# EAGLE board RedBot Whisker Bumper-Panel-v11 (EAGLE 6.5.0)
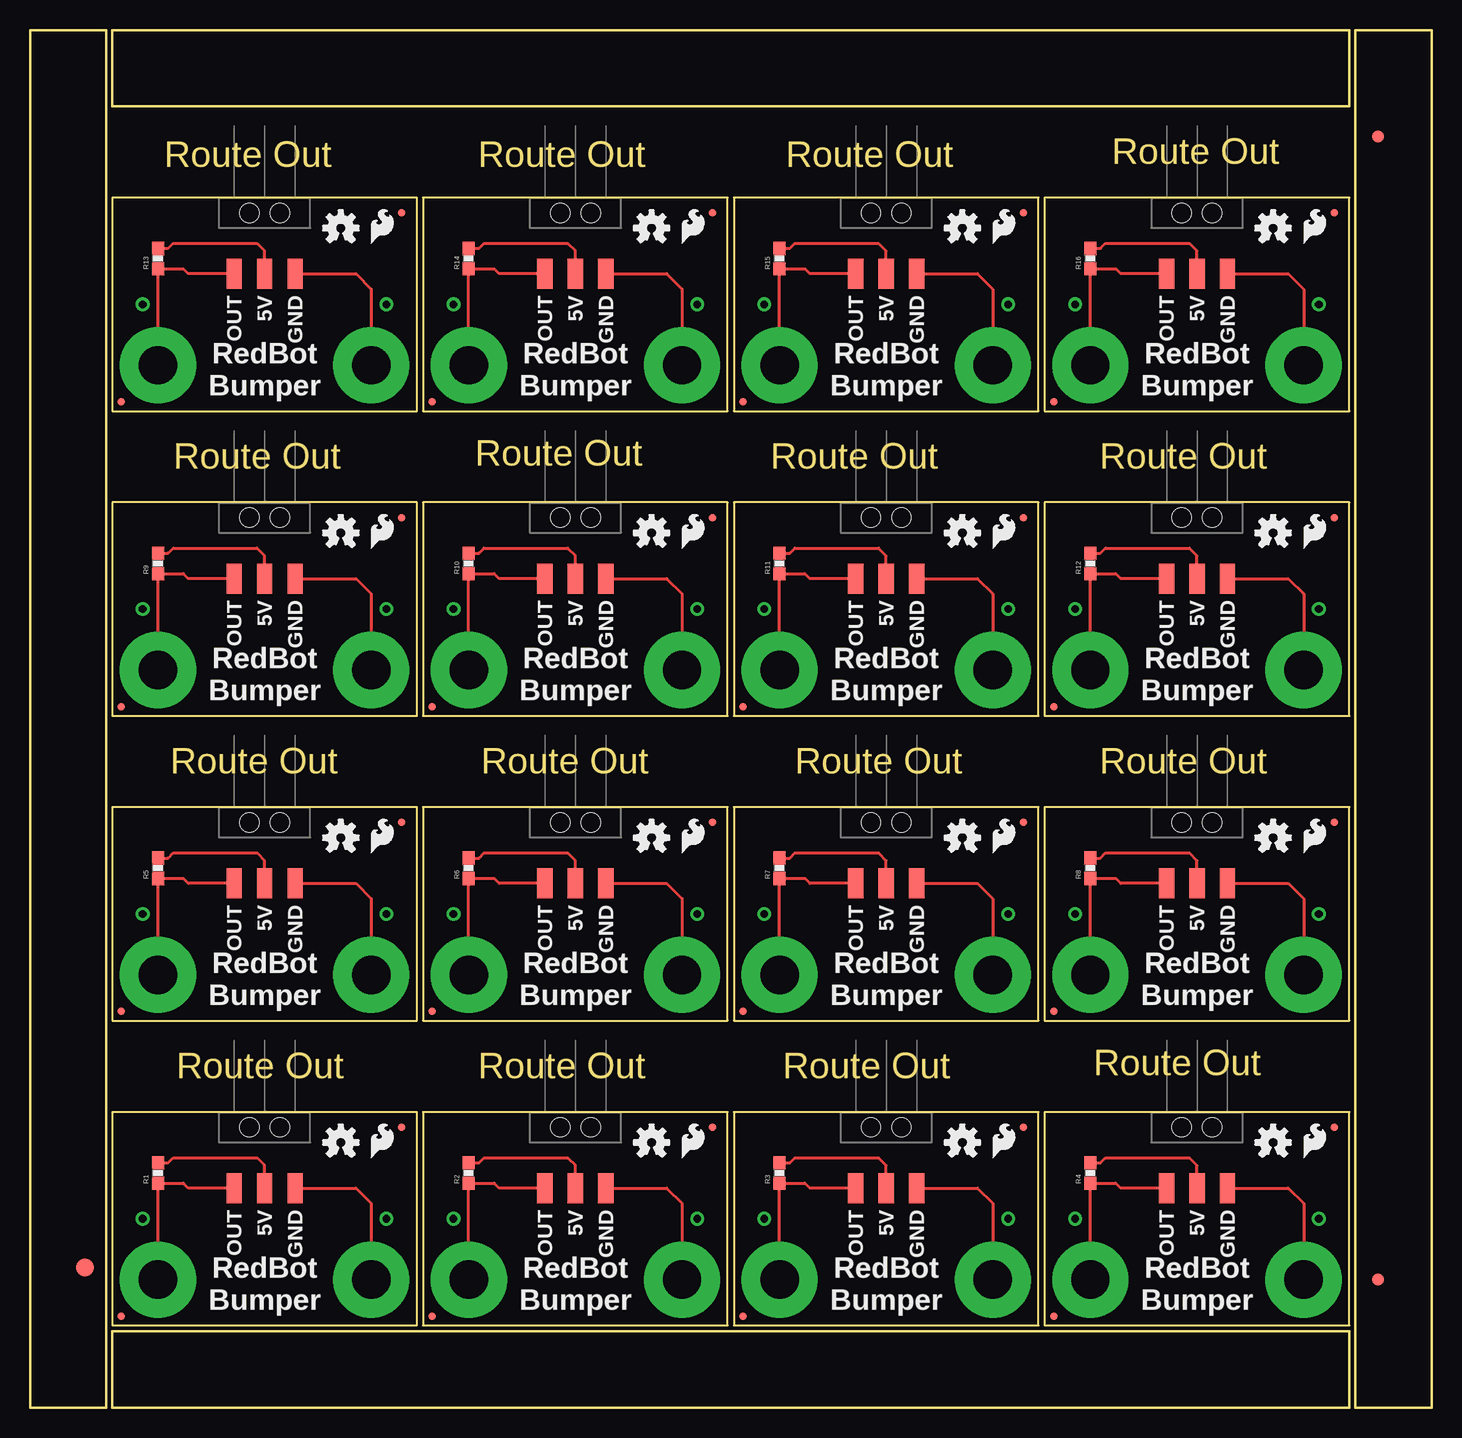
[diagram p0: board, top side]
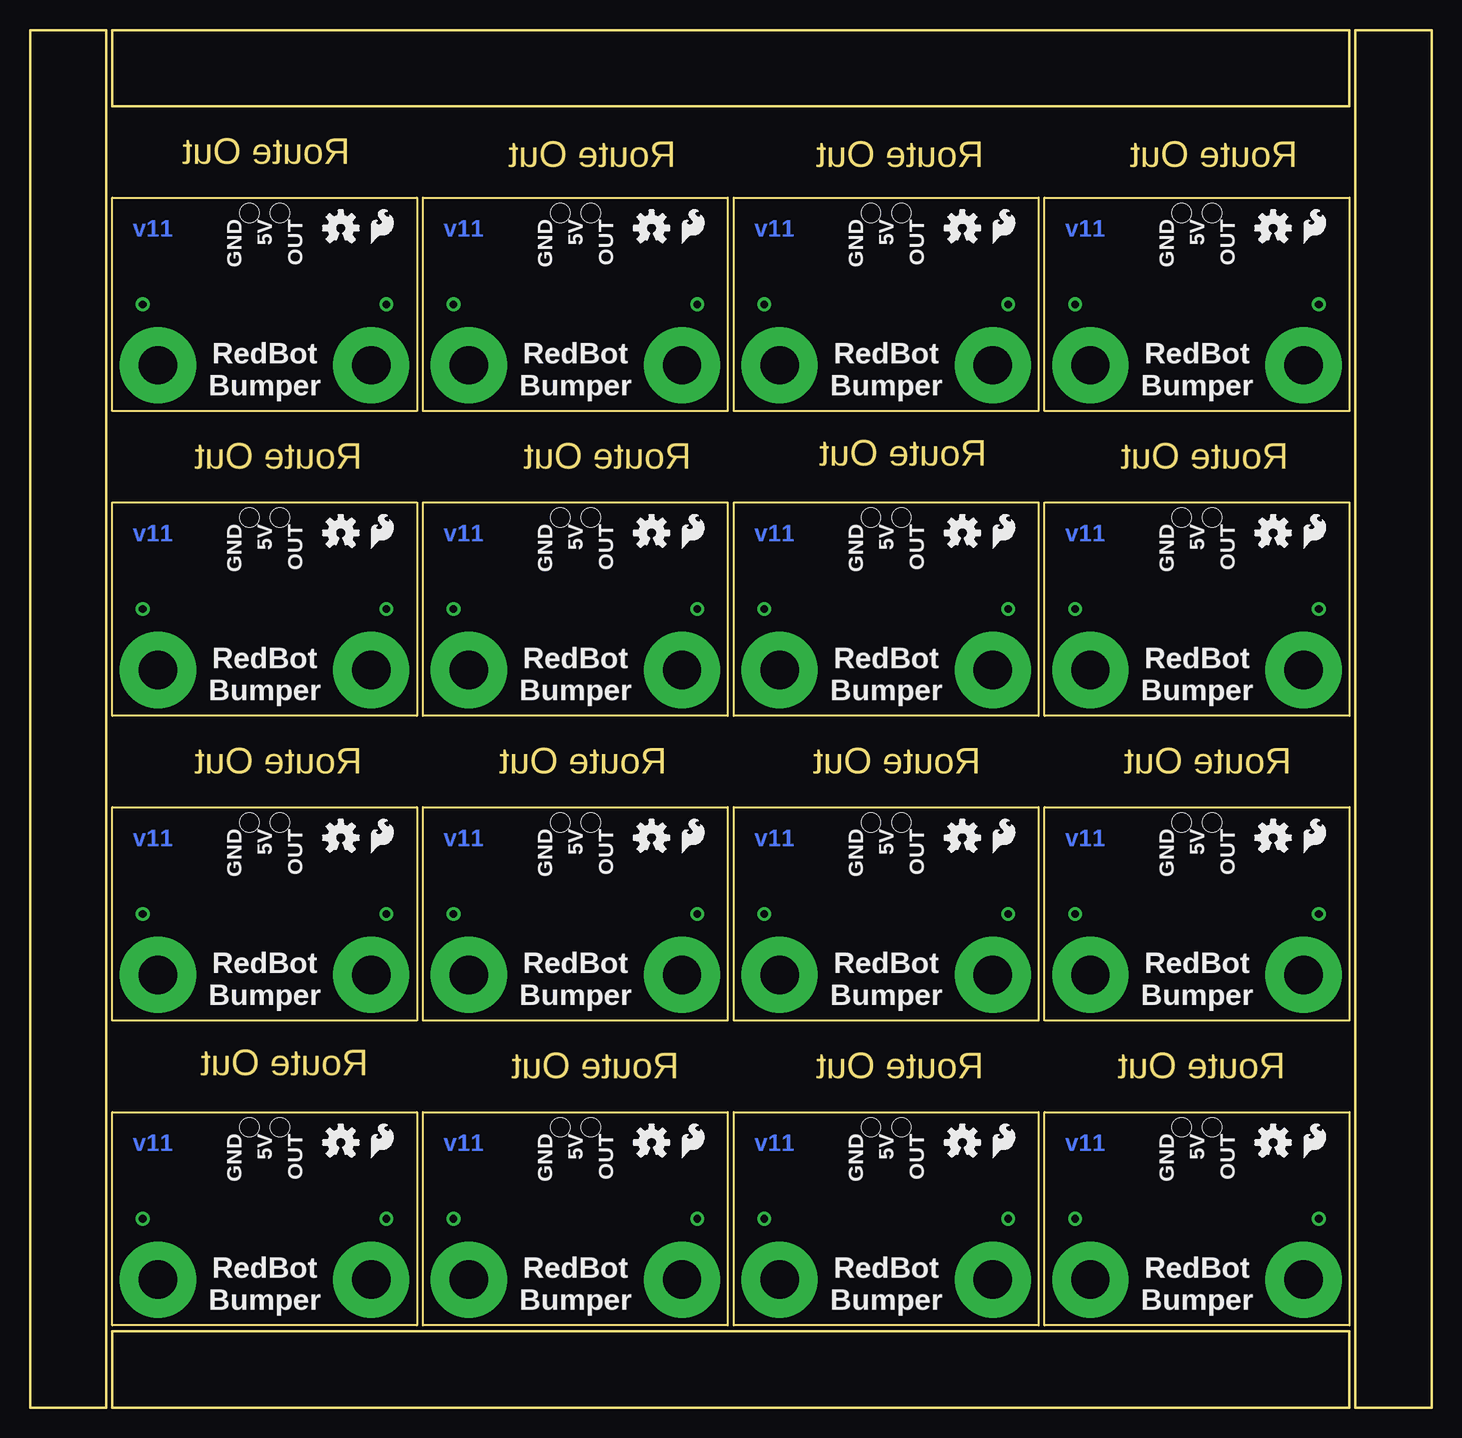
[diagram p1: board, bottom side, seen from below]

Size 116.84 x 114.81 mm. Coordinates in mm from the lower left corner, seen from the top.
Outline: 6.35,79.25 6.35,0 0,0 0,29.72
Outline: 116.84,79.25 116.84,0 110.49,0 110.49,29.72
Outline: 110.49,28.45 110.49,114.81 116.84,114.81 116.84,77.98
Outline: 0,28.45 0,114.81 6.35,114.81 6.35,77.98
Outline: 6.86,6.86 32.26,6.86 32.26,24.64 6.86,24.64 6.86,6.86
Outline: 32.77,6.86 58.17,6.86 58.17,24.64 32.77,24.64 32.77,6.86
Outline: 58.67,6.86 84.07,6.86 84.07,24.64 58.67,24.64 58.67,6.86
Outline: 84.58,6.86 109.98,6.86 109.98,24.64 84.58,24.64 84.58,6.86
Outline: 6.86,32.26 32.26,32.26 32.26,50.04 6.86,50.04 6.86,32.26
Outline: 32.77,32.26 58.17,32.26 58.17,50.04 32.77,50.04 32.77,32.26
Outline: 58.67,32.26 84.07,32.26 84.07,50.04 58.67,50.04 58.67,32.26
Outline: 84.58,32.26 109.98,32.26 109.98,50.04 84.58,50.04 84.58,32.26
Outline: 6.86,57.66 32.26,57.66 32.26,75.44 6.86,75.44 6.86,57.66
Outline: 32.77,57.66 58.17,57.66 58.17,75.44 32.77,75.44 32.77,57.66
Outline: 58.67,57.66 84.07,57.66 84.07,75.44 58.67,75.44 58.67,57.66
Outline: 84.58,57.66 109.98,57.66 109.98,75.44 84.58,75.44 84.58,57.66
Outline: 6.86,83.06 32.26,83.06 32.26,100.84 6.86,100.84 6.86,83.06
Outline: 32.77,83.06 58.17,83.06 58.17,100.84 32.77,100.84 32.77,83.06
Outline: 58.67,83.06 84.07,83.06 84.07,100.84 58.67,100.84 58.67,83.06
Outline: 84.58,83.06 109.98,83.06 109.98,100.84 84.58,100.84 84.58,83.06
Outline: 6.86,0 109.98,0 109.98,6.35 6.86,6.35 6.86,0
Outline: 109.98,114.81 6.86,114.81 6.86,108.46 109.98,108.46 109.98,114.81
Copper layers (1*16): Top 0.035mm / dielectric 1.5mm / Bottom 0.035mm
Design rules "SparkFun-2-layer": minimum track width 7mil, minimum drill 15mil, track to track 8mil, track to pad 8mil, pad to pad 8mil, via to via 8mil, smd to smd 8mil, copper to edge 8mil, drill to drill 8mil, minimum pad ring 12mil, minimum via ring 10mil, stop-mask expansion 4mil, vias tented up to drill 20mil, thermal gap 10mil

## Footprints (pad centres in the part's own frame; a part is rotated, then mirrored left to right if it is on the bottom)
FIDUCIAL-1.5X3 = smd 1.5 x 1.5: 1 0,0
FIDUCIAL-1X2 = smd 1 x 1: 1 0,0
MICRO-FIDUCIAL = smd 0.635 x 0.635: 1 0,0
1X03_SMD_RA_MALE_POST = smd 1.27 x 2.5: 1 -2.54,5.07; 2 0,5.07; 3 2.54,5.07 | hole 1.6: -1.27,0; 1.27,0
0603-RES = smd 1.1 x 1: 1 -0.85,0; 2 0.85,0
STANDOFF-ELECTRICAL = drill 3.2 pad 6.35: P1 0,0

## Placement (x,y rotation side)
E$1  [FIDUCIAL-1.5X3]  4.57,11.68 0 top
E$4  [FIDUCIAL-1X2]  112.39,10.67 0 top
E$5  [FIDUCIAL-1X2]  112.39,105.92 180 top
FID1  FIDUCIALUFIDUCIAL  [MICRO-FIDUCIAL]  7.62,7.62 0 top
FID2  FIDUCIALUFIDUCIAL  [MICRO-FIDUCIAL]  30.99,23.37 0 top
FID3  FIDUCIALUFIDUCIAL  [MICRO-FIDUCIAL]  33.53,7.62 0 top
FID4  FIDUCIALUFIDUCIAL  [MICRO-FIDUCIAL]  56.9,23.37 0 top
FID5  FIDUCIALUFIDUCIAL  [MICRO-FIDUCIAL]  59.44,7.62 0 top
FID6  FIDUCIALUFIDUCIAL  [MICRO-FIDUCIAL]  82.8,23.37 0 top
FID7  FIDUCIALUFIDUCIAL  [MICRO-FIDUCIAL]  85.34,7.62 0 top
FID8  FIDUCIALUFIDUCIAL  [MICRO-FIDUCIAL]  108.71,23.37 0 top
FID9  FIDUCIALUFIDUCIAL  [MICRO-FIDUCIAL]  7.62,33.02 0 top
FID10  FIDUCIALUFIDUCIAL  [MICRO-FIDUCIAL]  30.99,48.77 0 top
FID11  FIDUCIALUFIDUCIAL  [MICRO-FIDUCIAL]  33.53,33.02 0 top
FID12  FIDUCIALUFIDUCIAL  [MICRO-FIDUCIAL]  56.9,48.77 0 top
FID13  FIDUCIALUFIDUCIAL  [MICRO-FIDUCIAL]  59.44,33.02 0 top
FID14  FIDUCIALUFIDUCIAL  [MICRO-FIDUCIAL]  82.8,48.77 0 top
FID15  FIDUCIALUFIDUCIAL  [MICRO-FIDUCIAL]  85.34,33.02 0 top
FID16  FIDUCIALUFIDUCIAL  [MICRO-FIDUCIAL]  108.71,48.77 0 top
FID17  FIDUCIALUFIDUCIAL  [MICRO-FIDUCIAL]  7.62,58.42 0 top
FID18  FIDUCIALUFIDUCIAL  [MICRO-FIDUCIAL]  30.99,74.17 0 top
FID19  FIDUCIALUFIDUCIAL  [MICRO-FIDUCIAL]  33.53,58.42 0 top
FID20  FIDUCIALUFIDUCIAL  [MICRO-FIDUCIAL]  56.9,74.17 0 top
FID21  FIDUCIALUFIDUCIAL  [MICRO-FIDUCIAL]  59.44,58.42 0 top
FID22  FIDUCIALUFIDUCIAL  [MICRO-FIDUCIAL]  82.8,74.17 0 top
FID23  FIDUCIALUFIDUCIAL  [MICRO-FIDUCIAL]  85.34,58.42 0 top
FID24  FIDUCIALUFIDUCIAL  [MICRO-FIDUCIAL]  108.71,74.17 0 top
FID25  FIDUCIALUFIDUCIAL  [MICRO-FIDUCIAL]  7.62,83.82 0 top
FID26  FIDUCIALUFIDUCIAL  [MICRO-FIDUCIAL]  30.99,99.57 0 top
FID27  FIDUCIALUFIDUCIAL  [MICRO-FIDUCIAL]  33.53,83.82 0 top
FID28  FIDUCIALUFIDUCIAL  [MICRO-FIDUCIAL]  56.9,99.57 0 top
FID29  FIDUCIALUFIDUCIAL  [MICRO-FIDUCIAL]  59.44,83.82 0 top
FID30  FIDUCIALUFIDUCIAL  [MICRO-FIDUCIAL]  82.8,99.57 0 top
FID31  FIDUCIALUFIDUCIAL  [MICRO-FIDUCIAL]  85.34,83.82 0 top
FID32  FIDUCIALUFIDUCIAL  [MICRO-FIDUCIAL]  108.71,99.57 0 top
JP1  [1X03_SMD_RA_MALE_POST]  19.56,23.37 180 top
JP2  [1X03_SMD_RA_MALE_POST]  45.47,23.37 180 top
JP3  [1X03_SMD_RA_MALE_POST]  71.37,23.37 180 top
JP4  [1X03_SMD_RA_MALE_POST]  97.28,23.37 180 top
JP5  [1X03_SMD_RA_MALE_POST]  19.56,48.77 180 top
JP6  [1X03_SMD_RA_MALE_POST]  45.47,48.77 180 top
JP7  [1X03_SMD_RA_MALE_POST]  71.37,48.77 180 top
JP8  [1X03_SMD_RA_MALE_POST]  97.28,48.77 180 top
JP9  [1X03_SMD_RA_MALE_POST]  19.56,74.17 180 top
JP10  [1X03_SMD_RA_MALE_POST]  45.47,74.17 180 top
JP11  [1X03_SMD_RA_MALE_POST]  71.37,74.17 180 top
JP12  [1X03_SMD_RA_MALE_POST]  97.28,74.17 180 top
JP13  [1X03_SMD_RA_MALE_POST]  19.56,99.57 180 top
JP14  [1X03_SMD_RA_MALE_POST]  45.47,99.57 180 top
JP15  [1X03_SMD_RA_MALE_POST]  71.37,99.57 180 top
JP16  [1X03_SMD_RA_MALE_POST]  97.28,99.57 180 top
LOGO1  OSHW-LOGOS  [OSHW-LOGO-S]  25.91,22.1 0 top
LOGO2  LOGO-SFESK  [SFE-LOGO-FLAME]  28.45,20.83 0 top
LOGO3  OSHW-LOGOS  [OSHW-LOGO-S]  13.21,22.1 0 bottom
LOGO4  LOGO-SFESK  [SFE-LOGO-FLAME]  10.67,20.83 0 bottom
LOGO5  OSHW-LOGOS  [OSHW-LOGO-S]  51.82,22.1 0 top
LOGO6  LOGO-SFESK  [SFE-LOGO-FLAME]  54.36,20.83 0 top
LOGO7  OSHW-LOGOS  [OSHW-LOGO-S]  39.12,22.1 0 bottom
LOGO8  LOGO-SFESK  [SFE-LOGO-FLAME]  36.58,20.83 0 bottom
LOGO9  OSHW-LOGOS  [OSHW-LOGO-S]  77.72,22.1 0 top
LOGO10  LOGO-SFESK  [SFE-LOGO-FLAME]  80.26,20.83 0 top
LOGO11  OSHW-LOGOS  [OSHW-LOGO-S]  65.02,22.1 0 bottom
LOGO12  LOGO-SFESK  [SFE-LOGO-FLAME]  62.48,20.83 0 bottom
LOGO13  OSHW-LOGOS  [OSHW-LOGO-S]  103.63,22.1 0 top
LOGO14  LOGO-SFESK  [SFE-LOGO-FLAME]  106.17,20.83 0 top
LOGO15  OSHW-LOGOS  [OSHW-LOGO-S]  90.93,22.1 0 bottom
LOGO16  LOGO-SFESK  [SFE-LOGO-FLAME]  88.39,20.83 0 bottom
LOGO17  OSHW-LOGOS  [OSHW-LOGO-S]  25.91,47.5 0 top
LOGO18  LOGO-SFESK  [SFE-LOGO-FLAME]  28.45,46.23 0 top
LOGO19  OSHW-LOGOS  [OSHW-LOGO-S]  13.21,47.5 0 bottom
LOGO20  LOGO-SFESK  [SFE-LOGO-FLAME]  10.67,46.23 0 bottom
LOGO21  OSHW-LOGOS  [OSHW-LOGO-S]  51.82,47.5 0 top
LOGO22  LOGO-SFESK  [SFE-LOGO-FLAME]  54.36,46.23 0 top
LOGO23  OSHW-LOGOS  [OSHW-LOGO-S]  39.12,47.5 0 bottom
LOGO24  LOGO-SFESK  [SFE-LOGO-FLAME]  36.58,46.23 0 bottom
LOGO25  OSHW-LOGOS  [OSHW-LOGO-S]  77.72,47.5 0 top
LOGO26  LOGO-SFESK  [SFE-LOGO-FLAME]  80.26,46.23 0 top
LOGO27  OSHW-LOGOS  [OSHW-LOGO-S]  65.02,47.5 0 bottom
LOGO28  LOGO-SFESK  [SFE-LOGO-FLAME]  62.48,46.23 0 bottom
LOGO29  OSHW-LOGOS  [OSHW-LOGO-S]  103.63,47.5 0 top
LOGO30  LOGO-SFESK  [SFE-LOGO-FLAME]  106.17,46.23 0 top
LOGO31  OSHW-LOGOS  [OSHW-LOGO-S]  90.93,47.5 0 bottom
LOGO32  LOGO-SFESK  [SFE-LOGO-FLAME]  88.39,46.23 0 bottom
LOGO33  OSHW-LOGOS  [OSHW-LOGO-S]  25.91,72.9 0 top
LOGO34  LOGO-SFESK  [SFE-LOGO-FLAME]  28.45,71.63 0 top
LOGO35  OSHW-LOGOS  [OSHW-LOGO-S]  13.21,72.9 0 bottom
LOGO36  LOGO-SFESK  [SFE-LOGO-FLAME]  10.67,71.63 0 bottom
LOGO37  OSHW-LOGOS  [OSHW-LOGO-S]  51.82,72.9 0 top
LOGO38  LOGO-SFESK  [SFE-LOGO-FLAME]  54.36,71.63 0 top
LOGO39  OSHW-LOGOS  [OSHW-LOGO-S]  39.12,72.9 0 bottom
LOGO40  LOGO-SFESK  [SFE-LOGO-FLAME]  36.58,71.63 0 bottom
LOGO41  OSHW-LOGOS  [OSHW-LOGO-S]  77.72,72.9 0 top
LOGO42  LOGO-SFESK  [SFE-LOGO-FLAME]  80.26,71.63 0 top
LOGO43  OSHW-LOGOS  [OSHW-LOGO-S]  65.02,72.9 0 bottom
LOGO44  LOGO-SFESK  [SFE-LOGO-FLAME]  62.48,71.63 0 bottom
LOGO45  OSHW-LOGOS  [OSHW-LOGO-S]  103.63,72.9 0 top
LOGO46  LOGO-SFESK  [SFE-LOGO-FLAME]  106.17,71.63 0 top
LOGO47  OSHW-LOGOS  [OSHW-LOGO-S]  90.93,72.9 0 bottom
LOGO48  LOGO-SFESK  [SFE-LOGO-FLAME]  88.39,71.63 0 bottom
LOGO49  OSHW-LOGOS  [OSHW-LOGO-S]  25.91,98.3 0 top
LOGO50  LOGO-SFESK  [SFE-LOGO-FLAME]  28.45,97.03 0 top
LOGO51  OSHW-LOGOS  [OSHW-LOGO-S]  13.21,98.3 0 bottom
LOGO52  LOGO-SFESK  [SFE-LOGO-FLAME]  10.67,97.03 0 bottom
LOGO53  OSHW-LOGOS  [OSHW-LOGO-S]  51.82,98.3 0 top
LOGO54  LOGO-SFESK  [SFE-LOGO-FLAME]  54.36,97.03 0 top
LOGO55  OSHW-LOGOS  [OSHW-LOGO-S]  39.12,98.3 0 bottom
LOGO56  LOGO-SFESK  [SFE-LOGO-FLAME]  36.58,97.03 0 bottom
LOGO57  OSHW-LOGOS  [OSHW-LOGO-S]  77.72,98.3 0 top
LOGO58  LOGO-SFESK  [SFE-LOGO-FLAME]  80.26,97.03 0 top
LOGO59  OSHW-LOGOS  [OSHW-LOGO-S]  65.02,98.3 0 bottom
LOGO60  LOGO-SFESK  [SFE-LOGO-FLAME]  62.48,97.03 0 bottom
LOGO61  OSHW-LOGOS  [OSHW-LOGO-S]  103.63,98.3 0 top
LOGO62  LOGO-SFESK  [SFE-LOGO-FLAME]  106.17,97.03 0 top
LOGO63  OSHW-LOGOS  [OSHW-LOGO-S]  90.93,98.3 0 bottom
LOGO64  LOGO-SFESK  [SFE-LOGO-FLAME]  88.39,97.03 0 bottom
R1  10K  [0603-RES]  10.67,19.56 90 top
R2  10K  [0603-RES]  36.58,19.56 90 top
R3  10K  [0603-RES]  62.48,19.56 90 top
R4  10K  [0603-RES]  88.39,19.56 90 top
R5  10K  [0603-RES]  10.67,44.96 90 top
R6  10K  [0603-RES]  36.58,44.96 90 top
R7  10K  [0603-RES]  62.48,44.96 90 top
R8  10K  [0603-RES]  88.39,44.96 90 top
R9  10K  [0603-RES]  10.67,70.36 90 top
R10  10K  [0603-RES]  36.58,70.36 90 top
R11  10K  [0603-RES]  62.48,70.36 90 top
R12  10K  [0603-RES]  88.39,70.36 90 top
R13  10K  [0603-RES]  10.67,95.76 90 top
R14  10K  [0603-RES]  36.58,95.76 90 top
R15  10K  [0603-RES]  62.48,95.76 90 top
R16  10K  [0603-RES]  88.39,95.76 90 top
S1  STANDOFF_ELECTRICAL  [STANDOFF-ELECTRICAL]  10.67,10.67 0 top
S2  STANDOFF_ELECTRICAL  [STANDOFF-ELECTRICAL]  28.45,10.67 0 top
S3  STANDOFF_ELECTRICAL  [STANDOFF-ELECTRICAL]  36.58,10.67 0 top
S4  STANDOFF_ELECTRICAL  [STANDOFF-ELECTRICAL]  54.36,10.67 0 top
S5  STANDOFF_ELECTRICAL  [STANDOFF-ELECTRICAL]  62.48,10.67 0 top
S6  STANDOFF_ELECTRICAL  [STANDOFF-ELECTRICAL]  80.26,10.67 0 top
S7  STANDOFF_ELECTRICAL  [STANDOFF-ELECTRICAL]  88.39,10.67 0 top
S8  STANDOFF_ELECTRICAL  [STANDOFF-ELECTRICAL]  106.17,10.67 0 top
S9  STANDOFF_ELECTRICAL  [STANDOFF-ELECTRICAL]  10.67,36.07 0 top
S10  STANDOFF_ELECTRICAL  [STANDOFF-ELECTRICAL]  28.45,36.07 0 top
S11  STANDOFF_ELECTRICAL  [STANDOFF-ELECTRICAL]  36.58,36.07 0 top
S12  STANDOFF_ELECTRICAL  [STANDOFF-ELECTRICAL]  54.36,36.07 0 top
S13  STANDOFF_ELECTRICAL  [STANDOFF-ELECTRICAL]  62.48,36.07 0 top
S14  STANDOFF_ELECTRICAL  [STANDOFF-ELECTRICAL]  80.26,36.07 0 top
S15  STANDOFF_ELECTRICAL  [STANDOFF-ELECTRICAL]  88.39,36.07 0 top
S16  STANDOFF_ELECTRICAL  [STANDOFF-ELECTRICAL]  106.17,36.07 0 top
S17  STANDOFF_ELECTRICAL  [STANDOFF-ELECTRICAL]  10.67,61.47 0 top
S18  STANDOFF_ELECTRICAL  [STANDOFF-ELECTRICAL]  28.45,61.47 0 top
S19  STANDOFF_ELECTRICAL  [STANDOFF-ELECTRICAL]  36.58,61.47 0 top
S20  STANDOFF_ELECTRICAL  [STANDOFF-ELECTRICAL]  54.36,61.47 0 top
S21  STANDOFF_ELECTRICAL  [STANDOFF-ELECTRICAL]  62.48,61.47 0 top
S22  STANDOFF_ELECTRICAL  [STANDOFF-ELECTRICAL]  80.26,61.47 0 top
S23  STANDOFF_ELECTRICAL  [STANDOFF-ELECTRICAL]  88.39,61.47 0 top
S24  STANDOFF_ELECTRICAL  [STANDOFF-ELECTRICAL]  106.17,61.47 0 top
S25  STANDOFF_ELECTRICAL  [STANDOFF-ELECTRICAL]  10.67,86.87 0 top
S26  STANDOFF_ELECTRICAL  [STANDOFF-ELECTRICAL]  28.45,86.87 0 top
S27  STANDOFF_ELECTRICAL  [STANDOFF-ELECTRICAL]  36.58,86.87 0 top
S28  STANDOFF_ELECTRICAL  [STANDOFF-ELECTRICAL]  54.36,86.87 0 top
S29  STANDOFF_ELECTRICAL  [STANDOFF-ELECTRICAL]  62.48,86.87 0 top
S30  STANDOFF_ELECTRICAL  [STANDOFF-ELECTRICAL]  80.26,86.87 0 top
S31  STANDOFF_ELECTRICAL  [STANDOFF-ELECTRICAL]  88.39,86.87 0 top
S32  STANDOFF_ELECTRICAL  [STANDOFF-ELECTRICAL]  106.17,86.87 0 top

## Library data of the parts
E$1 E$4 E$5 FID1-FID32 LOGO1-LOGO64 = SparkFun-Aesthetics
JP1-JP16 = SparkFun-Connectors
R1-R16 = SparkFun-Resistors; PROD_ID: RES-00824
S1-S32 = SparkFun-Electromechanical

## Nets
5V: JP1.2 R1.2
5V1: JP2.2 R2.2
5V2: JP3.2 R3.2
5V3: JP4.2 R4.2
5V4: JP5.2 R5.2
5V5: JP6.2 R6.2
5V6: JP7.2 R7.2
5V7: JP8.2 R8.2
5V8: JP9.2 R9.2
5V9: JP10.2 R10.2
5V10: JP11.2 R11.2
5V11: JP12.2 R12.2
5V12: JP13.2 R13.2
5V13: JP14.2 R14.2
5V14: JP15.2 R15.2
5V15: JP16.2 R16.2
GND: JP1.1 S2.P1
GND1: JP2.1 S4.P1
GND2: JP3.1 S6.P1
GND3: JP4.1 S8.P1
GND4: JP5.1 S10.P1
GND5: JP6.1 S12.P1
GND6: JP7.1 S14.P1
GND7: JP8.1 S16.P1
GND8: JP9.1 S18.P1
GND9: JP10.1 S20.P1
GND10: JP11.1 S22.P1
GND11: JP12.1 S24.P1
GND12: JP13.1 S26.P1
GND13: JP14.1 S28.P1
GND14: JP15.1 S30.P1
GND15: JP16.1 S32.P1
OUT: JP1.3 R1.1 S1.P1
OUT1: JP2.3 R2.1 S3.P1
OUT2: JP3.3 R3.1 S5.P1
OUT3: JP4.3 R4.1 S7.P1
OUT4: JP5.3 R5.1 S9.P1
OUT5: JP6.3 R6.1 S11.P1
OUT6: JP7.3 R7.1 S13.P1
OUT7: JP8.3 R8.1 S15.P1
OUT8: JP9.3 R9.1 S17.P1
OUT9: JP10.3 R10.1 S19.P1
OUT10: JP11.3 R11.1 S21.P1
OUT11: JP12.3 R12.1 S23.P1
OUT12: JP13.3 R13.1 S25.P1
OUT13: JP14.3 R14.1 S27.P1
OUT14: JP15.3 R15.1 S29.P1
OUT15: JP16.3 R16.1 S31.P1

## Tracks (layer width: path | path; a pad name or v marks a point on that pad's centre or on a via)
5V
  Top 0.254: JP1.2 19.56,20.19 18.92,20.83 11.94,20.83 11.52,20.41 R1.2
5V1
  Top 0.254: JP2.2 45.47,20.19 44.83,20.83 37.85,20.83 37.43,20.41 R2.2
5V2
  Top 0.254: JP3.2 71.37,20.19 70.74,20.83 63.75,20.83 63.33,20.41 R3.2
5V3
  Top 0.254: JP4.2 97.28,20.19 96.65,20.83 89.66,20.83 89.24,20.41 R4.2
5V4
  Top 0.254: JP5.2 19.56,45.59 18.92,46.23 11.94,46.23 11.52,45.81 R5.2
5V5
  Top 0.254: JP6.2 45.47,45.59 44.83,46.23 37.85,46.23 37.43,45.81 R6.2
5V6
  Top 0.254: JP7.2 71.37,45.59 70.74,46.23 63.75,46.23 63.33,45.81 R7.2
5V7
  Top 0.254: JP8.2 97.28,45.59 96.65,46.23 89.66,46.23 89.24,45.81 R8.2
5V8
  Top 0.254: JP9.2 19.56,70.99 18.92,71.63 11.94,71.63 11.52,71.21 R9.2
5V9
  Top 0.254: JP10.2 45.47,70.99 44.83,71.63 37.85,71.63 37.43,71.21 R10.2
5V10
  Top 0.254: JP11.2 71.37,70.99 70.74,71.63 63.75,71.63 63.33,71.21 R11.2
5V11
  Top 0.254: JP12.2 97.28,70.99 96.65,71.63 89.66,71.63 89.24,71.21 R12.2
5V12
  Top 0.254: JP13.2 19.56,96.39 18.92,97.03 11.94,97.03 11.52,96.61 R13.2
5V13
  Top 0.254: JP14.2 45.47,96.39 44.83,97.03 37.85,97.03 37.43,96.61 R14.2
5V14
  Top 0.254: JP15.2 71.37,96.39 70.74,97.03 63.75,97.03 63.33,96.61 R15.2
5V15
  Top 0.254: JP16.2 97.28,96.39 96.65,97.03 89.66,97.03 89.24,96.61 R16.2
GND
  Top 0.254: JP1.1 27.17,18.3 28.45,17.02 S2.P1
GND1
  Top 0.254: JP2.1 53.08,18.3 54.36,17.02 S4.P1
GND2
  Top 0.254: JP3.1 78.98,18.3 80.26,17.02 S6.P1
GND3
  Top 0.254: JP4.1 104.89,18.3 106.17,17.02 S8.P1
GND4
  Top 0.254: JP5.1 27.17,43.7 28.45,42.42 S10.P1
GND5
  Top 0.254: JP6.1 53.08,43.7 54.36,42.42 S12.P1
GND6
  Top 0.254: JP7.1 78.98,43.7 80.26,42.42 S14.P1
GND7
  Top 0.254: JP8.1 104.89,43.7 106.17,42.42 S16.P1
GND8
  Top 0.254: JP9.1 27.17,69.1 28.45,67.82 S18.P1
GND9
  Top 0.254: JP10.1 53.08,69.1 54.36,67.82 S20.P1
GND10
  Top 0.254: JP11.1 78.98,69.1 80.26,67.82 S22.P1
GND11
  Top 0.254: JP12.1 104.89,69.1 106.17,67.82 S24.P1
GND12
  Top 0.254: JP13.1 27.17,94.5 28.45,93.22 S26.P1
GND13
  Top 0.254: JP14.1 53.08,94.5 54.36,93.22 S28.P1
GND14
  Top 0.254: JP15.1 78.98,94.5 80.26,93.22 S30.P1
GND15
  Top 0.254: JP16.1 104.89,94.5 106.17,93.22 S32.P1
N$1  (via drill 0.64)
  other vias: 9.4,15.75
N$2  (via drill 0.64)
  other vias: 29.72,15.75
N$3  (via drill 0.64)
  other vias: 35.31,15.75
N$4  (via drill 0.64)
  other vias: 55.63,15.75
N$5  (via drill 0.64)
  other vias: 61.21,15.75
N$6  (via drill 0.64)
  other vias: 81.53,15.75
N$7  (via drill 0.64)
  other vias: 87.12,15.75
N$8  (via drill 0.64)
  other vias: 107.44,15.75
N$9  (via drill 0.64)
  other vias: 9.4,41.15
N$10  (via drill 0.64)
  other vias: 29.72,41.15
N$11  (via drill 0.64)
  other vias: 35.31,41.15
N$12  (via drill 0.64)
  other vias: 55.63,41.15
N$13  (via drill 0.64)
  other vias: 61.21,41.15
N$14  (via drill 0.64)
  other vias: 81.53,41.15
N$15  (via drill 0.64)
  other vias: 87.12,41.15
N$16  (via drill 0.64)
  other vias: 107.44,41.15
N$17  (via drill 0.64)
  other vias: 9.4,66.55
N$18  (via drill 0.64)
  other vias: 29.72,66.55
N$19  (via drill 0.64)
  other vias: 35.31,66.55
N$20  (via drill 0.64)
  other vias: 55.63,66.55
N$21  (via drill 0.64)
  other vias: 61.21,66.55
N$22  (via drill 0.64)
  other vias: 81.53,66.55
N$23  (via drill 0.64)
  other vias: 87.12,66.55
N$24  (via drill 0.64)
  other vias: 107.44,66.55
N$25  (via drill 0.64)
  other vias: 9.4,91.95
N$26  (via drill 0.64)
  other vias: 29.72,91.95
N$27  (via drill 0.64)
  other vias: 35.31,91.95
N$28  (via drill 0.64)
  other vias: 55.63,91.95
N$29  (via drill 0.64)
  other vias: 61.21,91.95
N$30  (via drill 0.64)
  other vias: 81.53,91.95
N$31  (via drill 0.64)
  other vias: 87.12,91.95
N$32  (via drill 0.64)
  other vias: 107.44,91.95
OUT
  Top 0.254: S1.P1 R1.1 12.79,18.71 13.2,18.3 JP1.3 17.01,18.29
OUT1
  Top 0.254: S3.P1 R2.1 38.7,18.71 39.11,18.3 JP2.3 42.92,18.29
OUT2
  Top 0.254: S5.P1 R3.1 64.6,18.71 65.01,18.3 JP3.3 68.82,18.29
OUT3
  Top 0.254: S7.P1 R4.1 90.51,18.71 90.92,18.3 JP4.3 94.73,18.29
OUT4
  Top 0.254: S9.P1 R5.1 12.79,44.11 13.2,43.7 JP5.3 17.01,43.69
OUT5
  Top 0.254: S11.P1 R6.1 38.7,44.11 39.11,43.7 JP6.3 42.92,43.69
OUT6
  Top 0.254: S13.P1 R7.1 64.6,44.11 65.01,43.7 JP7.3 68.82,43.69
OUT7
  Top 0.254: S15.P1 R8.1 90.51,44.11 90.92,43.7 JP8.3 94.73,43.69
OUT8
  Top 0.254: S17.P1 R9.1 12.79,69.51 13.2,69.1 JP9.3 17.01,69.09
OUT9
  Top 0.254: S19.P1 R10.1 38.7,69.51 39.11,69.1 JP10.3 42.92,69.09
OUT10
  Top 0.254: S21.P1 R11.1 64.6,69.51 65.01,69.1 JP11.3 68.82,69.09
OUT11
  Top 0.254: S23.P1 R12.1 90.51,69.51 90.92,69.1 JP12.3 94.73,69.09
OUT12
  Top 0.254: S25.P1 R13.1 12.79,94.91 13.2,94.5 JP13.3 17.01,94.49
OUT13
  Top 0.254: S27.P1 R14.1 38.7,94.91 39.11,94.5 JP14.3 42.92,94.49
OUT14
  Top 0.254: S29.P1 R15.1 64.6,94.91 65.01,94.5 JP15.3 68.82,94.49
OUT15
  Top 0.254: S31.P1 R16.1 90.51,94.91 90.92,94.5 JP16.3 94.73,94.49

## Text on the board
Bottom: v11 | v11 | v11 | v11 | v11 | v11 | v11 | v11 | v11 | v11 | v11 | v11 | v11 | v11 | v11 | v11
Dimension: Route Out | Route Out | Route Out | Route Out | Route Out | Route Out | Route Out | Route Out | Route Out | Route Out | Route Out | Route Out | Route Out | Route Out | Route Out | Route Out
tPlace: OUT | 5V | GND | OUT | 5V | GND | OUT | 5V | GND | OUT | 5V | GND | RedBot / Bumper | RedBot / Bumper | RedBot / Bumper | RedBot / Bumper | OUT | 5V | GND | OUT | 5V | GND | OUT | 5V | GND | OUT | 5V | GND | RedBot / Bumper | RedBot / Bumper | RedBot / Bumper | RedBot / Bumper | OUT | 5V | GND | OUT | 5V | GND | OUT | 5V | GND | OUT | 5V | GND | RedBot / Bumper | RedBot / Bumper | RedBot / Bumper | RedBot / Bumper | OUT | 5V | GND | OUT | 5V | GND | OUT | 5V | GND | OUT | 5V | GND | RedBot / Bumper | RedBot / Bumper | RedBot / Bumper | RedBot / Bumper
bPlace: OUT | 5V | GND | OUT | 5V | GND | OUT | 5V | GND | OUT | 5V | GND | RedBot / Bumper | RedBot / Bumper | RedBot / Bumper | RedBot / Bumper | OUT | 5V | GND | OUT | 5V | GND | OUT | 5V | GND | OUT | 5V | GND | RedBot / Bumper | RedBot / Bumper | RedBot / Bumper | RedBot / Bumper | OUT | 5V | GND | OUT | 5V | GND | OUT | 5V | GND | OUT | 5V | GND | RedBot / Bumper | RedBot / Bumper | RedBot / Bumper | RedBot / Bumper | OUT | 5V | GND | OUT | 5V | GND | OUT | 5V | GND | OUT | 5V | GND | RedBot / Bumper | RedBot / Bumper | RedBot / Bumper | RedBot / Bumper